# Altium PCB daugherboard_EF_dev_kit.PcbDoc
Units mm, origin at the board's own origin, x right, y up, seen from the top; angles counter-clockwise.
Board outline 35.5 x 21.5 mm, 4 copper layers (Top Layer, GND, PWR, Bottom Layer), stack 1.623 mm thick; 38 components, 31 nets, 135 pads, 38 vias.
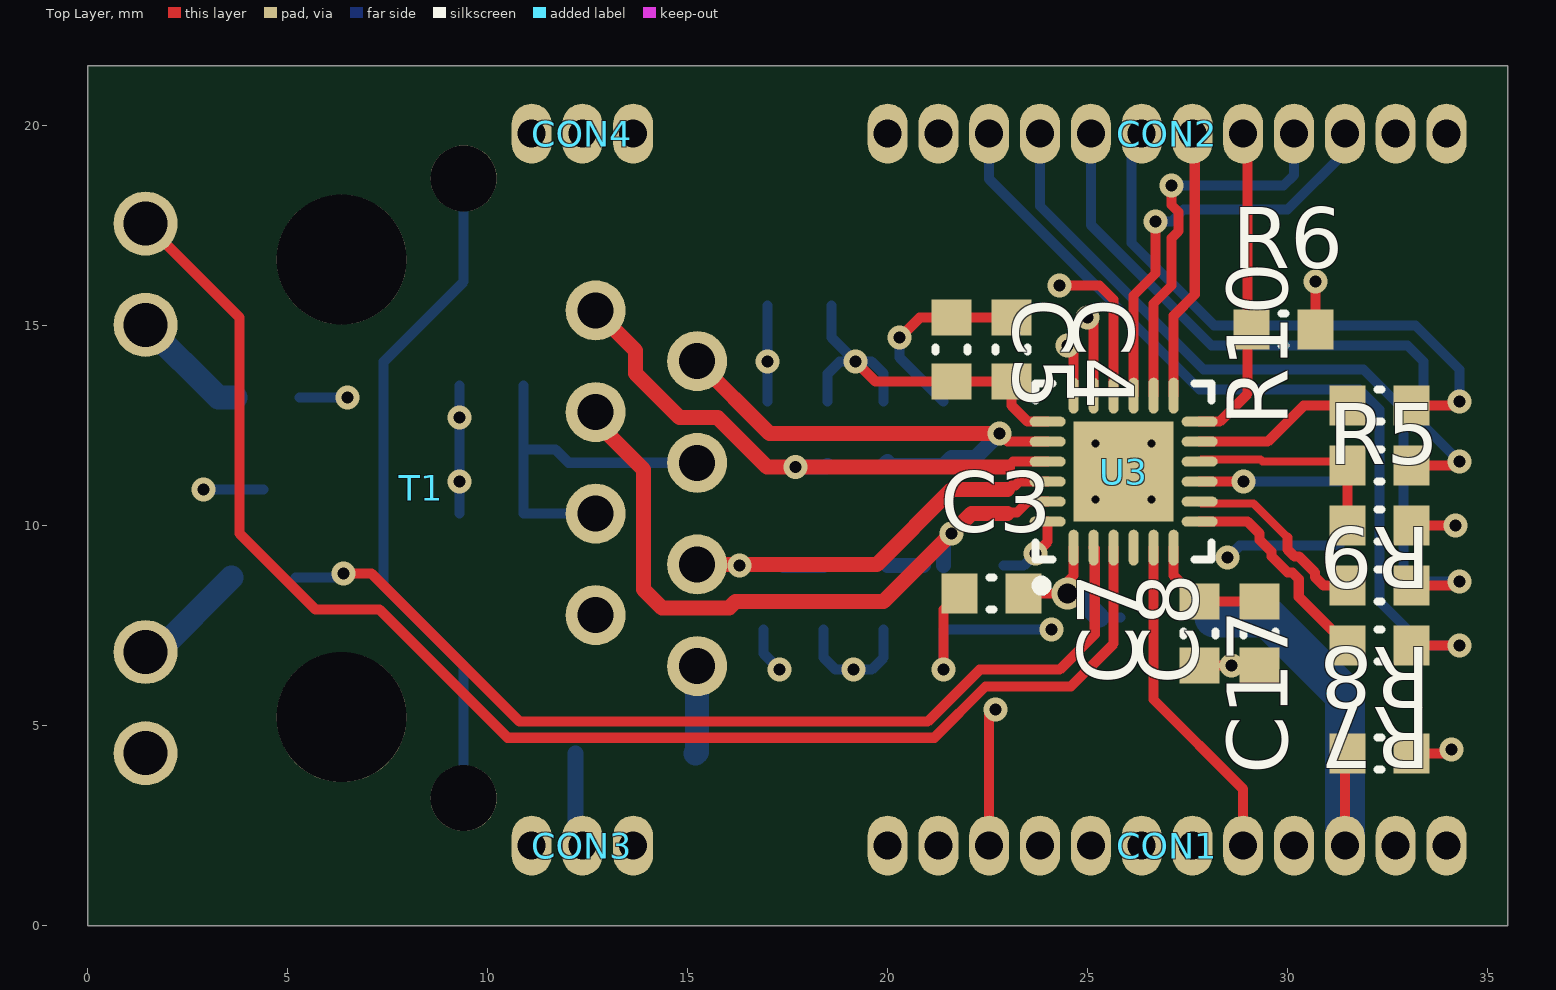
[diagram p0: Top Layer view]
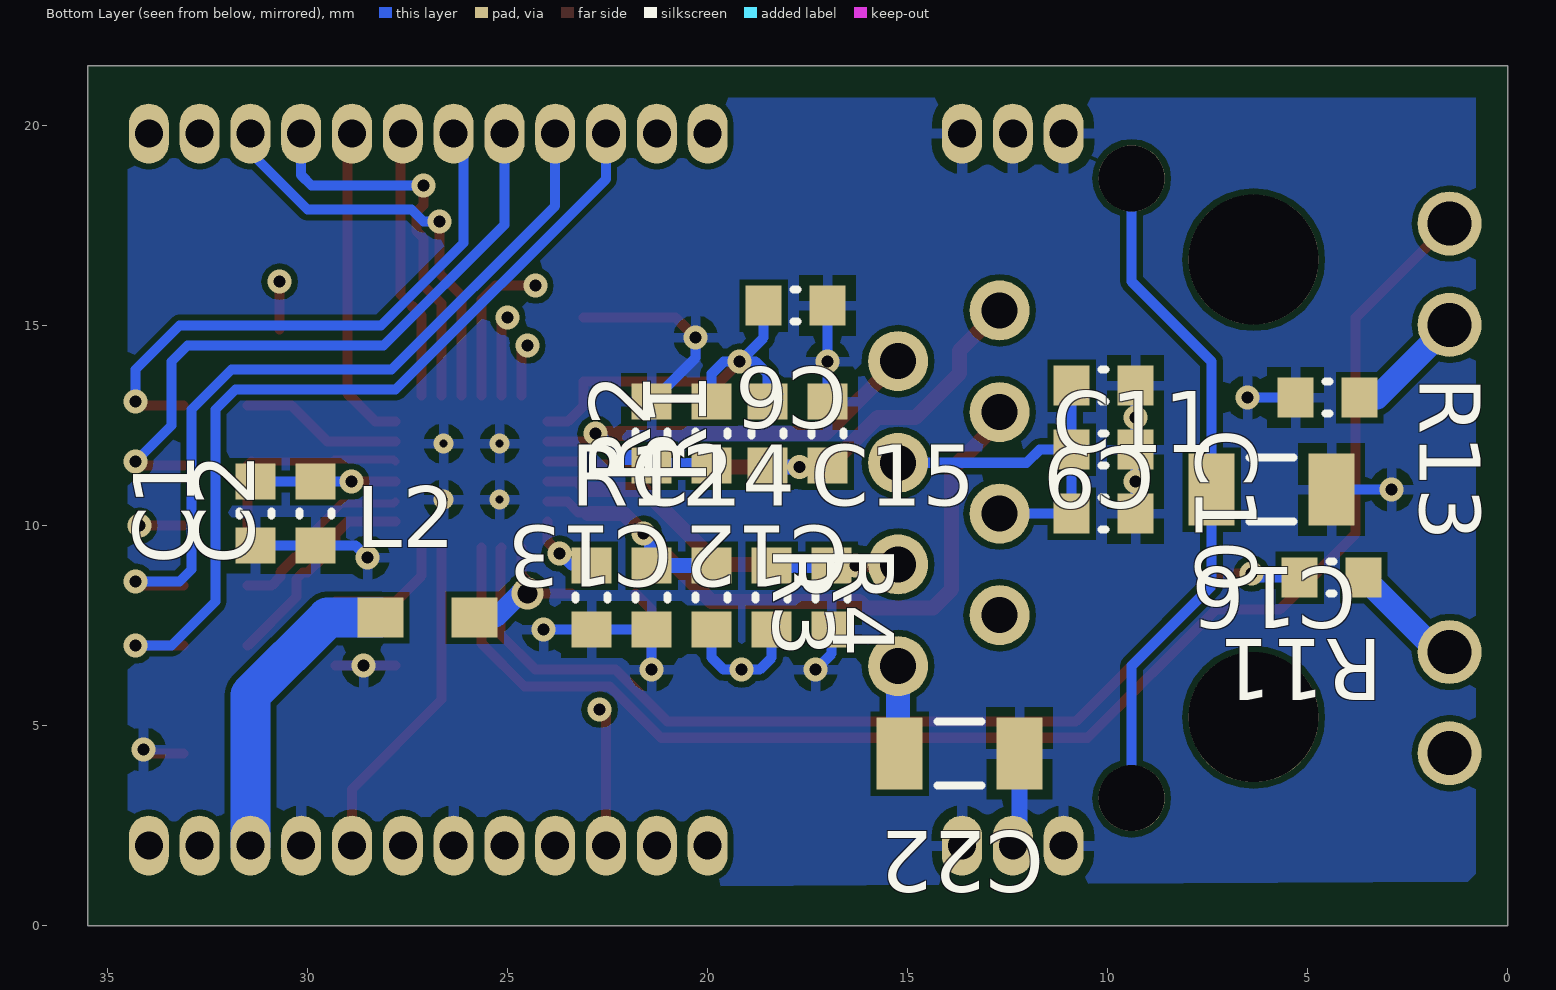
[diagram p1: Bottom Layer view, seen from below]
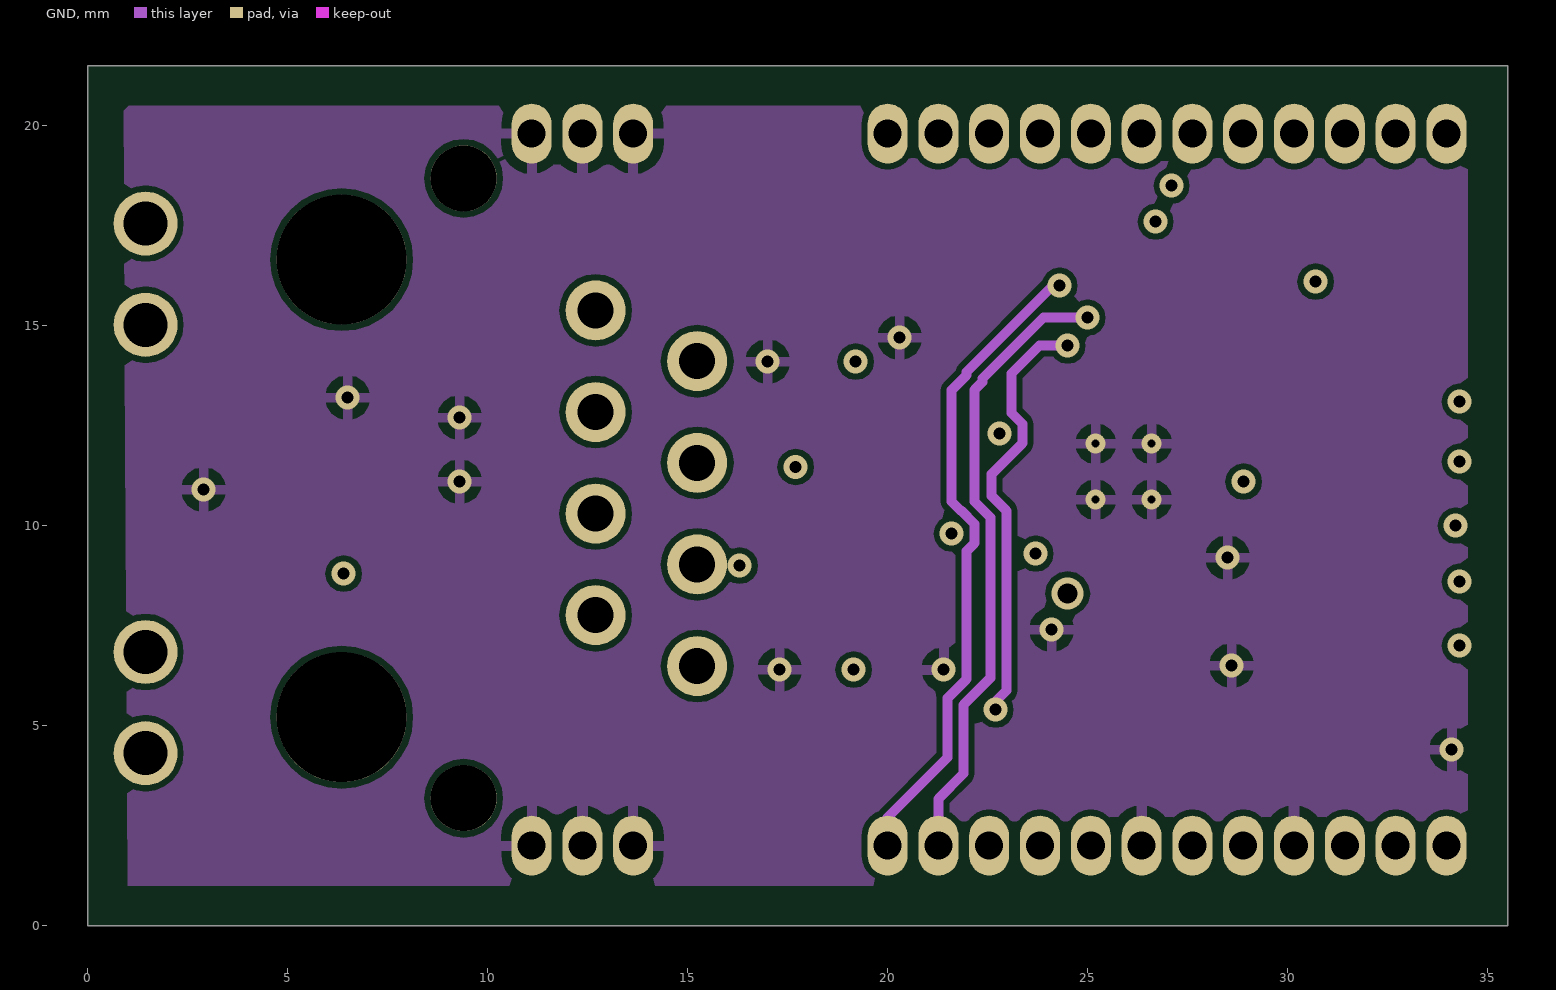
[diagram p2: GND]
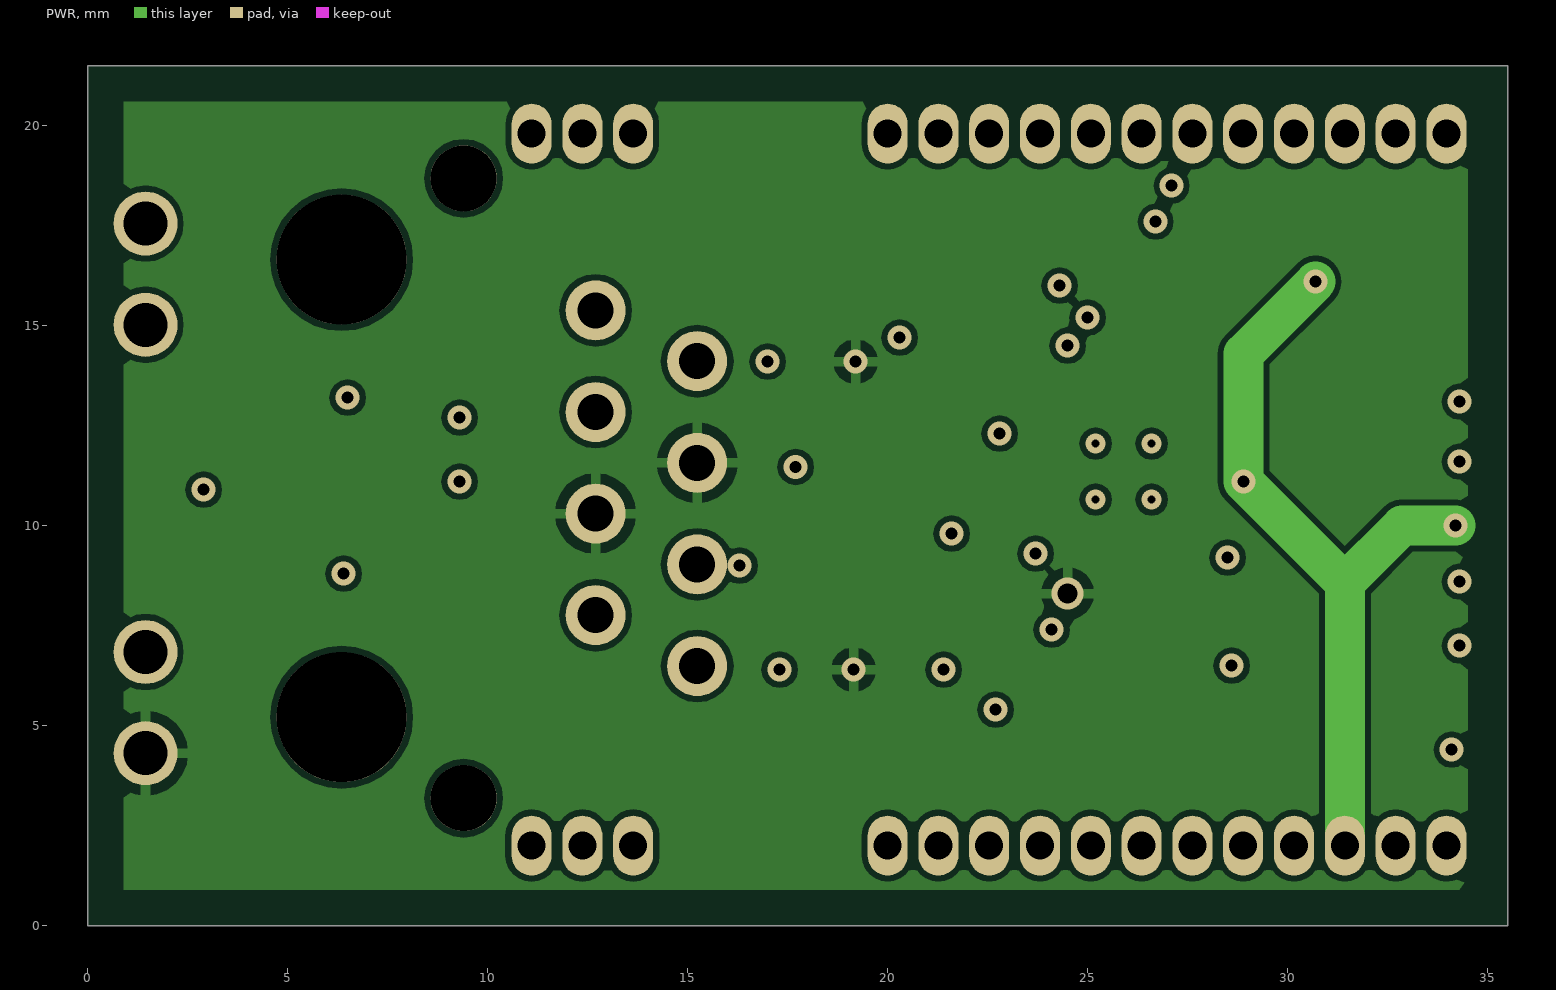
[diagram p3: PWR]

## Layer stack, top to bottom
Top Solder: solder mask 0.01, Solder Resist, Dk 3.5
Top Layer: signal copper 0.0356
Dielectric 1: prepreg 0.175, Dk 4.29
GND: signal copper 0.036
Dielectric 3: core 1.13, fr-4, Dk 3.96
PWR: signal copper 0.036
Dielectric 2: prepreg 0.175, Dk 4.29
Bottom Layer: signal copper 0.0356
Bottom Solder: solder mask 0.0102, Solder Resist, Dk 3.5

## Board outline
0,0 35.5,0 35.5,21.5 0,21.5

## Design rules (kind name [scope] priority, off if disabled: settings)
Clearance [All] p1: gap=0.15 ignorepadtopadclearanceinfootprint=FALSE
ComponentClearance [All] p1: gap=0.1 collisioncheckmode=3 verticalgap=0.254 showdistances=FALSE
DiffPairsRouting [All] p1: maxlimit=0.254 minlimit=0.254 mostfreqgap=0.254 toplayer_minwidth=0.2 toplayer_maxwidth=0.381 toplayer_prefwidth=0.381 midlayer1_minwidth=0.381 midlayer1_maxwidth=0.381 midlayer1_prefwidth=0.381 midlayer2_minwidth=0.381 midlayer2_maxwidth=0.381 midlayer2_prefwidth=0.381 bottomlayer_minwidth=0.381 bottomlayer_maxwidth=0.381 bottomlayer_prefwidth=0.381 maxuncoupledlength=12.7
HoleSize [All] p1: absolutevalues=TRUE maxlimit=10 minlimit=0.3 maxpercent=80.000 minpercent=20.000
PolygonConnect [All] p1: connectstyle=Relief reliefconductorwidth=0.254 reliefentries=4 polygonreliefangle="90 Angle" airgapwidth=0.254
RoutingVias [All] p1: holewidth=0.3 width=0.6 viastyle="Through Hole" minholewidth=0.3 minwidth=0.6 maxholewidth=6 maxwidth=7
SolderMaskExpansion [All] p1: expansion=0.102
Width [All] p1: maxlimit=10 minlimit=0.15 preferedwidth=0.254
27 further rules are at their usual default settings.

## Classes and differential pairs
component class lan8742_daughterboard_EF: C1 C2 C3 C4 C5 C6 C7 C8 C9 C10 C11 C12 C13 C14 C15 C16 C17 C22 CON1 CON2 CON3 CON4 L2 R2 R3 R4 R5 R6 R7 R8 R9 R10 R11 R12 R13 U3
differential pair TX: +TX_P -TX_N
differential pair RX: +RX_P -RX_N

## Components (designator, comment, footprint, x,y, rotation, side; value= is the part's Value field where it differs from the comment)
C1 "CAP" CAP_0603 31.3,10.3 r90 bottom
C2 "CAP" CAP_0603 29.8,10.3 r90 bottom
C3 "CAP" CAP_0603 22.6,8.3 r0 top
C4 "CAP" CAP_0603 23.1,14.4 r270 top
C5 "CAP" CAP_0603 21.6,14.4 r270 top
C6 "CAP" CAP_0603 17.8,15.5 r0 bottom
C7 "CAP" CAP_0603 27.8,7.3 r90 top
C8 "CAP" CAP_0603 29.3,7.3 r90 top
C9 "CAP" CAP_0603 10.1,13.5 r0 bottom
C10 "CAP" CAP_0603 10.1,11.9 r180 bottom
C11 "CAP" CAP_0603 10.1,10.3 r180 bottom
C12 "CAP" CAP_0603 17,12.3 r270 bottom
C13 "CAP" CAP_0603 21.4,12.3 r270 bottom
C14 "CAP" CAP_0603 21.4,8.2 r90 bottom
C15 "CAP" CAP_0603 16.9,8.2 r90 bottom
C16 "CAP" CAP_1206 5.9,10.9 r0 bottom
C17 "CAP" CAP_0603 32.3,4.3 r180 top
C22 "CAP" CAP_1206 13.7,4.3 r0 bottom
CON1 "S9014E-12-ND" S9014E-12-ND 20,2 r0 top locked
CON2 "S9014E-12-ND" S9014E-12-ND 20,19.8 r0 top locked
CON3 "S9014E-3-ND" S9014E-3-ND 13.64,2 r180 top locked
CON4 "S9014E-3-ND" S9014E-3-ND 13.64,19.8 r180 top locked
L2 "INDUCTOR" SMD-0805 27,7.7 r180 bottom
R1 "RES" RES_0603 18.5,12.3 r90 bottom
R2 "RES" RES_0603 19.9,12.3 r90 bottom
R3 "RES" RES_0603 19.9,8.2 r270 bottom
R4 "RES" RES_0603 18.4,8.2 r270 bottom
R5 "RES" RES_0603 32.3,10 r0 top
R6 "RES" RES_0603 29.9,14.9 r0 top
R7 "RES" RES_0603 32.3,7 r180 top
R8 "RES" RES_0603 32.3,8.5 r180 top
R9 "RES" RES_0603 32.3,11.5 r180 top
R10 "RES" RES_0603 32.3,13 r180 top
R11 "RES" RES_0603 4.4,8.7 r0 bottom
R12 "RES" RES_0603 22.9,8.2 r90 bottom
R13 "RES" RES_0603 4.5,13.2 r180 bottom
T1 "HR913129A" HR913129A 6.35,10.93 r90 top locked
U3 "LAN8742" LAN8742 25.9,11.35 r90 top

## Footprints (in the part's own frame and the unit in brackets; to place one, negate y for a bottom-side part, rotate by r counter-clockwise, add the part's x,y. Pads: shape width x height; smd on the part's side, far side on the other; paste and mask are expansions set on the pad)
CAP_0603 [mm]
  rect 0.9x1 smd: 1(-0.8,0) 2(0.8,0)
  silkscreen extent -0.05,-0.4 0.05,0.4, body extent -0.87,-0.48 0.88,0.47, height 1
CAP_1206 [mm]
  rect 1.15x1.8 smd: 1(-1.5,0) 2(1.5,0)
  silkscreen extent -0.55,-0.8 0.55,0.8, body extent -1.7,-0.9 1.7,0.9, height 1.7
HR913129A [mm]
  round 1.5 hole 0.9: 1(4.45,-6.35) 2(3.18,-8.89) 3(1.91,-6.35) 4(0.64,-8.89) 5(-0.63,-6.35) 6(-1.9,-8.89) 7(-3.17,-6.35) 8(-4.44,-8.89)
  round 1.6 hole 1.1: 9(6.62,4.9) 10(4.09,4.9) 11(-4.09,4.9) 12(-6.62,4.9)
  round 1.65 hole 1.65 unplated: 13(7.75,-3.05) 14(-7.745,-3.05)
  round 3.25 hole 3.25 unplated: 15(5.72,0) 16(-5.72,0)
  body extent -8.1,-10.68 8.02,10.99, height 13.5
LAN8742 [mm]
  oval 0.9x0.25 smd paste-0.04: 1(-1.9,1.25) 2(-1.9,0.75) 3(-1.9,0.25) 4(-1.9,-0.25) 5(-1.9,-0.75) 6(-1.9,-1.25) 13(1.9,-1.25) 14(1.9,-0.75) 15(1.9,-0.25) 16(1.9,0.25) 17(1.9,0.75) 18(1.9,1.25)
  oval 0.25x0.9 smd paste-0.04: 7(-1.25,-1.9) 8(-0.75,-1.9) 9(-0.25,-1.9) 10(0.25,-1.9) 11(0.75,-1.9) 12(1.25,-1.9) 19(1.25,1.9) 20(0.75,1.9) 21(0.25,1.9) 22(-0.25,1.9) 23(-0.75,1.9) 24(-1.25,1.9)
  rect 2.5x2.5 smd paste-2: 25(0,0)
  silkscreen extent -2.97,-2.2 2.2,2.2, body extent -2.05,-2.05 2.05,2.05, height 1
RES_0603 [mm]
  rect 0.9x1 smd: 1(-0.8,0) 2(0.8,0)
  silkscreen extent -0.05,-0.4 0.05,0.4, body extent -0.85,-0.47 0.85,0.47, height 0.6
S9014E-3-ND [mm]
  oval 1x1.5 hole 0.7 unplated paste-0.076 mask+0: 1(0,0) 2(1.27,0) 3(2.54,0)
S9014E-12-ND [mm]
  oval 1x1.5 hole 0.7 unplated paste-0.076 mask+0: 1(0,0) 2(1.27,0) 3(2.54,0) 4(3.81,0) 5(5.08,0) 6(6.35,0) 7(7.62,0) 8(8.89,0) 9(10.16,0) 10(11.43,0) 11(12.7,0) 12(13.97,0)
SMD-0805 [mm]
  rect 1.15x1 smd: 1(-1.175,0) 2(1.175,0)
  body extent -1,-0.6 1,0.6, height 0.89

## Part data
C1 C5 C6 C8 C9: library part CAP_4u7F/10V_0603, Part_Value=4u7F/10V, value_numeric=4.7E-6, Installed=False, Machine=1, Part_Group_Name=Capacitors, Part Number=CAP_4u7F/10V_0603, Placement_Type=1, Price=0.05, Size=603, static_cmp=40
C2 C3 C4: library part CAP_10nF/50V_0603, Part_Value=10nF/50V, value_numeric=1E-8, Installed=False, Machine=1, Part_Group_Name=Capacitors, Part Number=CAP_10nF/50V_0603, Placement_Type=1, Price=0.05, Size=603, static_cmp=42
C7: library part CAP_470pF/50V_0603, "470pF Ceramic", Part_Value=470pF/50V, value_numeric=4.7E-11, Installed=False, Machine=1, Part_Group_Name=Capacitors, Part Number=CAP_470pF/50V_0603, Placement_Type=1, Price=0.05, Size=603, static_cmp=38
C10 C11: library part CAP_22nF/50V_0603, Part_Value=22nF, value_numeric=0, Part_Group_Name=Capacitors, Part Number=CAP_22nF/50V_0603, Placement_Type=1, Price=0, Size=0
C12 C13 C14 C15: library part CAP_22pF/50V_0603, Part_Value=22pF/50V, value_numeric=2.2E-11, Installed=False, Machine=1, Part_Group_Name=Capacitors, Part Number=CAP_22pF/50V_0603, Placement_Type=6, Price=0.05, Size=603, static_cmp=50
C16 C22: library part CAP_1nF/2000V_1206, Part_Value=1nF/2000V, value_numeric=1E-9, Installed=False, Machine=1, Part_Group_Name=Capacitors, Part Number=CAP_1nF/2000V_1206, Placement_Type=6, Price=0.05, Size=1206, static_cmp=41
C17: library part CAP_100nF/25V_0603, Part_Value=100nF/25V, value_numeric=0, Part_Group_Name=Capacitors, Part Number=CAP_100nF/25V_0603, Placement_Type=1, Price=0, Size=0
CON1 CON2: "12 way .05\" header plug", value_numeric=0, Part_Group_Name=Connector, Part_Value=S9014E-12-ND, Part Number=S9014E-12-ND, Placement_Type=2
CON3 CON4: "3 way .05\" header", value_numeric=0, Part_Group_Name=Connector, Part_Value=S9014E-3-ND, Part Number=S9014E-3-ND, Placement_Type=2
L2: library part FER_1500R, "SMD EMI Suppression Ferrite Bead WE-CBF, Z = 1500 Ohm", Part_Value=1500R, value_numeric=1500, Installed=False, Machine=1, Part_Group_Name=Inductors, Part Number=FER_1500R, Placement_Type=1, Price=0.15, Size=805, static_cmp=27
R1 R2 R3 R4: library part RES_49R9_0603, "49R9 .1W 1% SMD", Part_Value=49R9, value_numeric=49, Installed=False, Machine=1, Part_Group_Name=Resistors, Part Number=RES_49R9_0603, Placement_Type=1, Price=0.0025, Size=603, static_cmp=5
R5 R12: library part RES_12K1_0603, "12k1 .1W 1% SMD", Part_Value=12K1, value_numeric=12100, Installed=False, Machine=1, Part_Group_Name=Resistors, Part Number=RES_12K1_0603, Price=0.0025, Size=603, static_cmp=4
  R5: Placement_Type=5
  R12: Placement_Type=1
R6: library part RES_1K56_0603, "1K58 .1W 1% SMD", Part_Value=1K56, value_numeric=1560, Installed=False, Machine=1, Part_Group_Name=Resistors, Part Number=RES_1K56_0603, Placement_Type=1, Price=0.0025, Size=603, static_cmp=8
R7 R8 R9 R10: library part RES_10R_0603, Part_Value=10R, value_numeric=0, Part_Group_Name=Resistors, Part Number=RES_10R_0603, Placement_Type=1, Price=0, Size=0
R11 R13: library part RES_330R_0603, Part_Value=330R, value_numeric=0, Part_Group_Name=Resistors, Part Number=RES_330R_0603, Placement_Type=1, Price=0, Size=0
U3: "Lan8742 RMMI PHY", Part_Value=8742, Part_Group_Name=Special_function_device, Part Number=LAN8742, Placement_Type=1, value_numeric=8742
T1: Part_Group_Name=Transformers, Part Number=HR913129A, Placement_Type=4

## Via types
v1: diameter 0.6, hole 0.3, Top Layer to Bottom Layer, tented both sides, 33 vias
v2: diameter 0.5, hole 0.2, Top Layer to Bottom Layer, 4 vias
v3: diameter 0.8, hole 0.5, Top Layer to Bottom Layer, tented both sides, 1 vias

## Nets (pads, with @x,y where several pads share a name; then routed paths per layer and width w, separated by ;. In a path a pad name is that pad's centre, name@x,y a point inside that pad or via, vN(x,y) a via of type N, cw(c..) or ccw(c..) an arc to the next point about the centre after c; other vN are vias at no path point)
CLK_IN: CON1.8 U3.5 | length 8.4
  Top Layer w0.25: U3.5 26.65,5.65 28.89,3.41 CON1.8
CRS_DV: CON2.6 R10.1 | length 14.4
  Top Layer w0.25: R10.1 34.2,13 v1(34.3,13.1)
  Bottom Layer w0.25: CON2.6 26.1,19.55 26.1,17.066 28.166,15 33.2,15 34.3,13.9 v1(34.3,13.1)
GND: C1.1 C2.1 C3.1 C4.1 C5.1 C6.1 C7.1 C8.1 C9.1 C10.2 C11.2 C12.1 C13.1 C14.1 C15.1 C16.1 C17.1 C22.1 CON1.6 CON1.9 CON3.1 CON3.2 CON3.3 CON4.1 CON4.2 CON4.3 R12.1 R13.1 U3.25 | length 28.1
  Top Layer w0.254: v1(20.3,14.7) 20.8,15.2 C5.1 C4.1 ; v1(21.4,6.4) 21.4,7.9 C3.1 ; C7.1 C8.1 ; C17.1 34,4.3 v1(34.1,4.4)
  Bottom Layer w0.254: v1(2.9,10.9) C16.1 ; R13.1 v1(6.5,13.2) ; C11.2 C9.1 ; CON3.2@12.2,2.17 CON3.2 ; C15.1 16.9,6.8 v1(17.3,6.4) ; C12.1 v1(17,14.1) C6.1 ; v1(20.3,14.7) 20.3,14.2 C13.1 ; v1(21.4,6.4) C14.1 R12.1 v1(24.1,7.4) ; v1(28.5,9.2) 28.8,9.5 C2.1 C1.1
  Bottom Layer w0.4: CON3.2@12.2,2.17 C22.1
  other v1: 28.6,6.5 9.3,11.1 9.3,12.7
  other v2: 25.2,10.65 26.6,10.65 25.2,12.05 26.6,12.05
LED1: T1.9 U3.3 | length 36.1
  Top Layer w0.254: T1.9 3.8,15.2 3.8,9.8 5.7,7.9 7.3,7.9 10.504,4.696 21.167,4.696 22.448,5.977 24.577,5.977 25.65,7.05 U3.3
LED2: R11.1 T1.11 | length 2.9
  Bottom Layer w0.6: T1.11 1.74,6.84 R11.1
MDC: CON2.7 U3.13 | length 6.8
  Top Layer w0.254: U3.13 27.15,15.25 27.677,15.777 27.677,19.743 CON2.7
MDIO: CON2.8 R6.1 U3.12 | length 8
  Top Layer w0.254: U3.12 28.3,12.6 29,13.3 29,19.69 CON2.8
NetC7_2: C7.2 C8.2 U3.6 | length 3.1
  Top Layer w0.254: U3.6 27.15,8.75 C7.2 C8.2
NetC16_2: C16.2 T1.13 T1.14 | length 17.2
  Bottom Layer w0.254: T1.14 9.4,6.5 7.4,8.5 C16.2 7.4,14.1 9.4,16.1 T1.13
NetC22_2: C22.2 T1.8 | length 2.2
  Bottom Layer w0.6: C22.2 15.24,4.34 T1.8
NetR5_1: R5.1 R9.2 U3.10 | length 5.3
  Top Layer w0.2: U3.10 27.85,11.65 29.328,11.65 29.378,11.6 R9.2@31.4,11.6
  Top Layer w0.254: R9.2@31.4,11.6 R9.2 R5.1
NetR7_2: R7.2 U3.7 | length 5.4
  Top Layer w0.254: U3.7 29,10.1 29.3,9.8 29.3,9.642 29.596,9.346 29.596,9.233 30.002,8.827 30.115,8.827 30.277,8.665 30.277,8.223 R7.2
NetR8_2: R8.2 U3.8 | length 4.8
  Top Layer w0.2: U3.8 27.85,10.55 29.15,10.55 30,9.7
  Top Layer w0.254: 30,9.7 30,9.4 30.169,9.231 30.282,9.231 30.681,8.832 30.681,8.719 30.9,8.5 R8.2
NetR10_2: R10.2 U3.11 | length 4.1
  Top Layer w0.254: U3.11 29.5,12.1 30.4,13 R10.2
NetR11_2: R11.2 U3.2 | length 24.6
  Top Layer w0.254: v1(6.4,8.8) 7.1,8.8 10.8,5.1 21,5.1 22.3,6.4 24.3,6.4 25.177,7.277 25.177,9.423 U3.2
  Bottom Layer w0.254: R11.2 6.3,8.7 v1(6.4,8.8)
NetR12_2: R12.2 U3.24 | length 1.8
  Top Layer w0.254: v1(23.7,9.3) 24,9.6 U3.24
  Bottom Layer w0.254: R12.2 23.4,9 v1(23.7,9.3)
NetR13_2: R13.2 T1.10 | length 3
  Bottom Layer w0.6: T1.10 3.27,13.2 R13.2
nINT: CON2.9 U3.14 | length 9.8
  Top Layer w0.25: U3.14 26.65,15.55 27.1,16 27.1,17.187 27.275,17.362 27.275,17.838 27.1,18.013 v1(27.1,18.5)
  Bottom Layer w0.25: v1(27.1,18.5) 29.9,18.5 30.16,18.76 CON2.9
nRST: CON2.10 U3.15 | length 10.5
  Top Layer w0.25: U3.15 26.15,15.75 26.7,16.3 v1(26.7,17.6)
  Bottom Layer w0.25: v1(26.7,17.6) 27.1,17.6 27.4,17.9 30,17.9 31.43,19.33 CON2.10
RX_D0: CON2.4 R8.1 | length 19.8
  Top Layer w0.25: R8.1 34.2,8.5 v1(34.3,8.6)
  Bottom Layer w0.25: CON2.4 23.81,17.99 27.9,13.9 31.9,13.9 32.9,12.9 32.9,8.9 33.2,8.6 v1(34.3,8.6)
RX_D1: CON2.3 R7.1 | length 21.7
  Top Layer w0.25: R7.1 v1(34.3,7)
  Bottom Layer w0.25: CON2.3 22.54,18.66 27.8,13.4 31.8,13.4 32.3,12.9 32.3,8.1 33.4,7 v1(34.3,7)
RX_ER: CON2.5 R9.1 | length 16.1
  Top Layer w0.25: R9.1 34.2,11.5 v1(34.3,11.6)
  Bottom Layer w0.25: CON2.5 25.08,17.52 28.1,14.5 33,14.5 33.4,14.1 33.4,12.5 v1(34.3,11.6)
RX_N: C15.2 R4.1 T1.6 U3.22 | length 10.6
  Top Layer w0.25: 23,10.9 23.099,11 23.193,11 23.293,11.1 U3.22
  Top Layer w0.381: T1.6 19.73,9.03 21.6,10.9 23,10.9
  Bottom Layer w0.381: 17.4,9 R4.1
  other v1: 16.3,9
RX_P: C14.2 R3.1 T1.3 U3.23 | length 18.1
  Top Layer w0.25: 23,10.3 23.031,10.331 23.237,10.331 23.506,10.6 U3.23
  Top Layer w0.381: T1.3 12.7,12.6 13.9,11.4 13.9,8.4 14.361,7.939 16.039,7.939 16.2,8.1 19.9,8.1 v1(21.6,9.8) 22.1,10.3 23,10.3
  Bottom Layer w0.381: R3.1@20,9 C14.2@20.9,9 ; C14.2 21.4,9.6 v1(21.6,9.8)
TX_D0: CON1.2 U3.17 | length 17.7
  Top Layer w0.25: v1(25,15.2) 25.15,15.05 U3.17
  GND w0.25: CON1.2 21.27,3.17 21.9,3.8 21.9,5.521 22.575,6.196 22.575,10.204 22.175,10.604 22.175,13.396 22.375,13.596 22.375,13.675 23.9,15.2 v1(25,15.2)
TX_D1: CON1.3 U3.18 | length 15.7
  Top Layer w0.25: CON1.3 22.54,5.44 22.58,5.4 v1(22.7,5.4) ; v1(24.5,14.5) 24.65,14.35 U3.18
  GND w0.25: v1(22.7,5.4) 22.7,5.6 22.975,5.875 22.975,10.37 22.6,10.745 22.6,11.287 23.375,12.062 23.375,12.538 23.1,12.813 23.1,13.8 23.8,14.5 v1(24.5,14.5)
TX_EN: CON1.1 U3.16 | length 20.3
  Top Layer w0.25: v1(24.3,16) 25.3,16 25.65,15.65 U3.16
  GND w0.25: CON1.1 20,2.7 21.5,4.2 21.5,5.687 21.975,6.162 21.975,9.362 22.175,9.562 22.175,10.038 21.838,10.375 21.825,10.375 21.6,10.6 21.6,13.387 21.975,13.762 21.975,13.841 24.134,16 v1(24.3,16)
TX_N: C13.2 R2.1 T1.2 U3.20 | length 13
  Top Layer w0.25: v1(22.8,12.3) 23,12.1 U3.20
  Top Layer w0.381: T1.2 17.05,12.3 v1(22.8,12.3)
  Bottom Layer w0.381: R2.1@20,11.6 R2.1 C13.2 21.6,11.7 22.2,11.7 v1(22.8,12.3)
TX_P: C12.2 R1.1 T1.1 U3.21 | length 14.1
  Top Layer w0.25: 23,11.465 23.135,11.6 U3.21
  Top Layer w0.381: T1.1 13.7,14.38 13.7,13.8 14.1,13.4 14.8,12.7 15.752,12.7 16.987,11.465 v1(17.7,11.465) 23,11.465
  Bottom Layer w0.381: v1(17.7,11.465) 18.465,11.465 R1.1
V3.3: C1.2 C2.2 C17.2 CON1.10 L2.1 R5.2 R6.2 U3.9 | length 35.2
  Top Layer w0.25: CON1.10 31.43,4.23 C17.2
  Top Layer w0.254: U3.9 v1(28.9,11.1) ; R6.2 v1(30.7,16.1) ; R5.2 v1(34.2,10)
  PWR w1: v1(30.7,16.1) 28.9,14.3 v1(28.9,11.1) 31.43,8.57 ; CON1.10 31.43,8.57 ; v1(34.2,10) 32.86,10 31.43,8.57
  Bottom Layer w0.254: v1(28.9,11.1) C2.2 C1.2
  Bottom Layer w1: L2.1 29.5,7.7 31.43,5.77 CON1.10
VDDA: C3.2 C4.2 C5.2 C6.2 C9.2 C10.1 C11.1 L2.2 R1.2 R2.2 R3.2 R4.2 T1.4 T1.5 T1.12 U3.1 U3.19 | length 26.8
  Top Layer w0.254: v1(19.2,14.1) 19.7,13.6 C5.2 C4.2 23.1,13 23.5,12.6 U3.19 ; C3.2 24.2,8.3 24.65,8.75 U3.1
  Bottom Layer w0.254: C9.2 C10.1 ; T1.5 C11.1 C10.1 ; T1.4 12.03,11.57 11.7,11.9 C10.1 ; R4.2 18.4,6.7 18.7,6.4 19.6,6.4 19.9,6.7 R3.2 ; R1.2 18.5,13.8 18.8,14.1 v1(19.2,14.1) ; C6.2 18.6,14.7 v1(19.2,14.1) ; R2.2 19.9,13.8 19.6,14.1 v1(19.2,14.1) ; L2.2@25.3,7.7 L2.2
  Bottom Layer w0.5: v3(24.5,8.3) 24.7,8.3 L2.2@25.3,7.7
  other v1: 19.15,6.4
pads on no net: CON1.4 CON1.5 CON1.7 CON1.11 CON1.12 CON2.1 CON2.2 CON2.11 CON2.12 T1.7 T1.15 T1.16 U3.4

## Polygon pours and split planes (outlines as drawn)
GND on GND "Component Side-No Net" (solid, pour order 0): 1,1 34.5,1 34.5,20.5 0.9,20.5
VDDA on PWR "Component Side-No Net" (solid, pour order 2): 0.9,0.9 34.5,0.9 34.6,1 34.5,1.1 34.5,20.6 0.9,20.6
GND on Bottom Layer "Component Side-No Net" (solid, pour order 4): 1,1.1 0.8,1.3 0.8,20.7 34.4,20.7 34.5,20.6 34.5,0.9

## Silkscreen, mask and mechanical layers (free items; w line width, h text height)
Mechanical 1:
  the board outline again, w0.2

## Text inside footprints (layer, text, board x,y; h text height)
T1: Top Overlay "^ EDGE ^" at -1.15,6.83 h2 r90